# EAGLE board soar_usb (EAGLE 8.3.1)

Size 76.23 x 20.34 mm. Coordinates in mm from the lower left corner, seen from the top.
Outline: 0,0 76.23,0.72 76.22,20.34 0.25,20.21 0,0
Copper layers (1*16): Top 0.035mm / dielectric 1.5mm / Bottom 0.035mm
Design rules "default": minimum track width 6mil, minimum drill 0.35mm, track to track 6mil, track to pad 6mil, pad to pad 6mil, via to via 6mil, smd to smd 6mil, copper to edge 40mil, drill to drill 6mil, minimum pad ring 10mil, minimum via ring 8mil, stop-mask expansion 4mil, vias tented up to drill 0mil, thermal gap 10mil
Net classes: 1 power: width 0.381 mm, clearance 0.254 mm

## Footprints (pad centres in the part's own frame; a part is rotated, then mirrored left to right if it is on the bottom)
TQFP32-08 = smd 1.27 x 0.533: 1 -4.293,2.8; 2 -4.293,2; 3 -4.293,1.2; 4 -4.293,0.4; 5 -4.293,-0.4; 6 -4.293,-1.2; 7 -4.293,-2; 8 -4.293,-2.8; 17 4.293,-2.8; 18 4.293,-2; 19 4.293,-1.2; 20 4.293,-0.4; 21 4.293,0.4; 22 4.293,1.2; 23 4.293,2; 24 4.293,2.8 | smd 0.533 x 1.27: 9 -2.8,-4.293; 10 -2,-4.293; 11 -1.2,-4.293; 12 -0.4,-4.293; 13 0.4,-4.293; 14 1.2,-4.293; 15 2,-4.293; 16 2.8,-4.293; 25 2.8,4.293; 26 2,4.293; 27 1.2,4.293; 28 0.4,4.293; 29 -0.4,4.293; 30 -1.2,4.293; 31 -2,4.293; 32 -2.8,4.293
0603-CAP = smd 1.016 x 0.965: 1 -0.85,0; 2 0.85,0
0805-CAP = smd 0.902 x 1.3: 1 -1,0; 2 1,0
0603-CAP' = smd 1.1 x 1: 1 -0.85,0; 2 0.85,0
USB-MINIB = smd 0.5 x 2.308: D+ 0,4.064; D- -0.8,4.064; GND 1.6,4.064; ID 0.8,4.064; VBUS -1.6,4.064 | smd 2 x 2.4: GND1 -4.4,-2; GND2 -4.4,3.5; GND3 4.4,3.5; GND4 4.4,-2 | hole 1: -2.2,1; 2.2,1
0603-RES = smd 1.016 x 0.965: 1 -0.85,0; 2 0.85,0
SOT23 = smd 1 x 1.4: 1 -0.95,-1.1; 2 0.95,-1.1; 3 0,1.1
JST-2-PTH-NS = drill 0.7 pad 1.6: 1 -1,0; 2 1,0
0603-RES' = smd 1.1 x 1: 1 -0.85,0; 2 0.85,0
SJW = smd 1.168 x 1.6: 1 -0.711,0; 2 0.711,0
SSOP20_L = smd 0.381 x 1.143: 1 -2.857,-2.68; 2 -2.223,-2.68; 3 -1.587,-2.68; 4 -0.953,-2.68; 5 -0.318,-2.68; 6 0.318,-2.68; 7 0.953,-2.68; 8 1.587,-2.68; 9 2.223,-2.68; 10 2.857,-2.68; 11 2.857,2.68; 12 2.223,2.68; 13 1.587,2.68; 14 0.953,2.68; 15 0.318,2.68; 16 -0.318,2.68; 17 -0.953,2.68; 18 -1.587,2.68; 19 -2.223,2.68; 20 -2.857,2.68
QFN24-3X3 = smd 0.495 x 0.25: 1 -1.552,1; 6 -1.552,-1; 13 1.552,-1; 18 1.552,1 | smd 0.6 x 0.25: 2 -1.5,0.6; 3 -1.5,0.2; 4 -1.5,-0.2; 5 -1.5,-0.6; 14 1.5,-0.6; 15 1.5,-0.2; 16 1.5,0.2; 17 1.5,0.6 | smd 0.25 x 0.495: 7 -1,-1.552; 12 1,-1.552; 19 1,1.552; 24 -1,1.552 | smd 0.25 x 0.6: 8 -0.6,-1.5; 9 -0.2,-1.5; 10 0.2,-1.5; 11 0.6,-1.5; 20 0.6,1.5; 21 0.2,1.5; 22 -0.2,1.5; 23 -0.6,1.5
RFM69CW-XXXS2 = smd 3 x 1.2: 1 -7.5,6; 2 -7.5,4; 3 -7.5,2; 4 -7.5,0; 5 -7.5,-2; 6 -7.5,-4; 7 -7.5,-6; 8 7.5,-6; 9 7.5,-4; 10 7.5,-2; 11 7.5,0; 12 7.5,2; 13 7.5,4; 14 7.5,6
BME280 = smd 0.7 x 0.35: 1 1.025,0.975; 2 1.025,0.325; 3 1.025,-0.325; 4 1.025,-0.975; 5 -1.025,-0.975; 6 -1.025,-0.325; 7 -1.025,0.325; 8 -1.025,0.975
0603-LED = smd 0.864 x 0.965: MINUS -0.85,0; PLUS 0.85,0
RFM12B-ANTENNA = drill 0.8 pad 1.422: P$1 0,0
SO08WIDE = smd 0.61 x 2.6: 1 -1.905,-3.269; 2 -0.635,-3.269; 3 0.635,-3.269; 4 1.905,-3.269; 5 1.905,3.286; 6 0.635,3.286; 7 -0.635,3.286; 8 -1.905,3.286
RESONATOR-SMD = smd 0.7 x 1.7: 1 -1.2,0; 2 0,0; 3 1.2,0

## Placement (x,y rotation side)
ATMEGA328  ATMega-328  [TQFP32-08]  38.23,8.35 0 top
C1  0.1  [0603-CAP]  64.1,3.47 180 top
C2  1u  [0603-CAP]  64.35,17.06 0 top
C3  10u  [0805-CAP]  62.96,5.88 0 bottom
C4  0.1  [0603-CAP]  62.96,8.68 0 bottom
C5  0.1  [0603-CAP]  62.96,11.47 0 bottom
C6  0.1u  [0603-CAP]  62.96,14.52 0 bottom
C9  0.1uF  [0603-CAP']  13.08,2.51 0 top
C10  0.1uF  [0603-CAP']  18.41,2.25 0 top
CN1  MINIB  [USB-MINIB]  4.06,14.3 270 top
D  SHOTTKY  [0603-RES]  67.78,17.06 0 top
FRAME1  FRAME-LETTER  [CREATIVE_COMMONS]  -80.01,-11.72 0 top  (outside the outline)
IC3  MCP1703CB  [SOT23]  12.95,4.29 0 bottom
J1  [JST-2-PTH-NS]  -91.92,-20.73 0 top  (outside the outline)
R1  10k  [0603-RES]  67.66,3.47 0 top
R2  1k5  [0603-RES]  29.21,12.8 90 top
R3  27  [0603-RES]  13.34,5.05 0 top
R4  [0603-RES]  8.77,-5.34 180 top  (outside the outline)
R5  27  [0603-RES]  13.08,7.59 0 top
R6  [0603-RES]  5.82,-5.91 0 top  (outside the outline)
R10  10K  [0603-RES']  13.21,10.26 0 bottom
R11  10K  [0603-RES']  60.16,3.47 0 top
R12  10K  [0603-RES']  29.59,3.91 270 top
R15  10K  [0603-RES']  13.08,5.3 0 top
SJ1  [SJW]  12.23,25.74 0 top  (outside the outline)
SJ6  [SJW]  7.31,26.02 0 top  (outside the outline)
U1  FT231XS  [SSOP20_L]  16,15.97 0 top
U2  9DoF IMU  [QFN24-3X3]  18.54,9.49 0 top
U3  915MHz  [RFM69CW-XXXS2]  31.24,9.37 0 bottom
U6  BME280  [BME280]  29.72,8.6 0 top
U$2  LED0603  [0603-LED]  29.21,16.22 0 top
U$3  RFM12B_ANTENNA  [RFM12B-ANTENNA]  38.61,20.92 0 top
U$4  LED0603  [0603-LED]  18.29,5.3 0 top
U$6  AT25F512BWIDE_5.3MM  [SO08WIDE]  66.51,10.45 0 top
U$7  LED0603  [0603-LED]  13.21,2.51 0 bottom
X1  16 MHz  [RESONATOR-SMD]  60.67,17.19 0 top

## Library data of the parts
ATMEGA328 C1-C6 CN1 D R1-R6 SJ1 SJ6 U$2-U$4 U$6 U$7 = LowPowerLab
C9 C10 = SparkFun-Capacitors; PROD_ID: CAP-00810
FRAME1 = SparkFun-Aesthetics
IC3 = linear
J1 = SparkFun-Connectors
R10-R12 R15 = SparkFun-Resistors; PROD_ID: RES-00824
U1 = SparkFun-DigitalIC
U2 = SparkFun-Sensors; PROD_ID: IC-13192
U3 = SparkFun-RF; PROD_ID: IC-11996
U6 = microbuilder
X1 = SparkFun

## Nets
A0: ATMEGA328.23
A1: ATMEGA328.24
A2: ATMEGA328.25
A3: ATMEGA328.26
A4_SDA: ATMEGA328.27 R12.1 U2.24 U6.3
A5_SCL: ATMEGA328.28 R11.1 U2.23 U6.4
A6: ATMEGA328.19
A7: ATMEGA328.22
AREF: ATMEGA328.20 C5.1
D0_RX: ATMEGA328.30 U1.20
D1_TX: ATMEGA328.31 U1.4
D2: ATMEGA328.32 U3.9
D3: ATMEGA328.1
D4: ATMEGA328.2
D5: ATMEGA328.9
D6: ATMEGA328.10
D7: ATMEGA328.11
D8: ATMEGA328.12 U$6.1
D9: ATMEGA328.13 R2.2
D10_SS: ATMEGA328.14 U3.7
D11_MOSI: ATMEGA328.15 U3.5 U$6.5
D12_MISO: ATMEGA328.16 U3.8 U$6.2
D13_SCK: ATMEGA328.17 U3.6 U$6.6
D+: CN1.D+ R5.1
D-: CN1.D- R3.1
DTR: SJ6.2 U1.1
FTDI3.3V: R4.2 R6.2 U1.3 U1.13 U1.14
GND [power]: ATMEGA328.3 ATMEGA328.5 ATMEGA328.21 C2.2 C3.2 C4.2 C5.2 C6.2 C10.2 CN1.GND IC3.1 R10.1 R15.1 U1.6 U1.16 U6.1 U6.7 U$2.MINUS U$6.4 X1.2
N$1: ATMEGA328.7 X1.1
N$2: R2.1 U$2.PLUS
N$3: C9.2 U2.11
N$4: R3.2 U1.12
N$5: R5.2 U1.11
N$6: U1.17 U$4.MINUS
N$7: U1.10 U$7.MINUS
N$8: R4.1 U$7.PLUS
N$9: R6.1 U$4.PLUS
N$10: R15.2 U6.5
N$11: R10.2 U2.9
N$14: U3.13
N$16: U3.11
N$17: U3.10
N$18: U3.4
N$19: U3.12
N$20: U3.3 U3.14
N$21: ATMEGA328.8 X1.3
N$22: U3.1 U$3.P$1
RST: ATMEGA328.29 C1.1 R1.2
RTS: SJ1.1 U1.2
RTS_OR_DTR: C1.2 SJ1.2 SJ6.1
VBUS [power]: C6.1 CN1.VBUS D.2 U1.15
VCC: ATMEGA328.4 ATMEGA328.6 ATMEGA328.18 C3.1 C4.1 C9.1 C10.1 IC3.2 R1.1 R11.2 R12.2 U2.1 U2.8 U2.13 U3.2 U6.2 U6.6 U6.8 U$6.3 U$6.7 U$6.8
VIN: C2.1 D.1 IC3.3

## Tracks (layer width: path | path; a pad name or v marks a point on that pad's centre or on a via)
A4_SDA  (3 unrouted)
A5_SCL  (3 unrouted)
AREF  (1 unrouted)
D0_RX  (1 unrouted)
D1_TX  (1 unrouted)
D2  (1 unrouted)
D8  (1 unrouted)
D9  (1 unrouted)
D10_SS  (1 unrouted)
D11_MOSI  (2 unrouted)
D12_MISO  (2 unrouted)
D13_SCK  (2 unrouted)
D+  (1 unrouted)
D-  (1 unrouted)
DTR  (1 unrouted)
FTDI3.3V  (4 unrouted)
GND  (19 unrouted)
N$1  (1 unrouted)
N$2  (1 unrouted)
N$3  (1 unrouted)
N$4  (1 unrouted)
N$5  (1 unrouted)
N$6  (1 unrouted)
N$7  (1 unrouted)
N$8  (1 unrouted)
N$9  (1 unrouted)
N$10  (1 unrouted)
N$11  (1 unrouted)
N$20  (1 unrouted)
N$21  (1 unrouted)
N$22  (1 unrouted)
RST  (2 unrouted)
RTS  (1 unrouted)
RTS_OR_DTR  (2 unrouted)
VBUS  (3 unrouted)
VCC  (20 unrouted)
VIN  (2 unrouted)